# Altium PCB distribution amp.pcbdoc
Units mm, origin at the board's own origin, x right, y up, seen from the top; angles counter-clockwise.
Board outline 160.02 x 100 mm, 2 copper layers (Top Layer, Bottom Layer); 150 components, 152 nets, 512 pads, 80 vias.
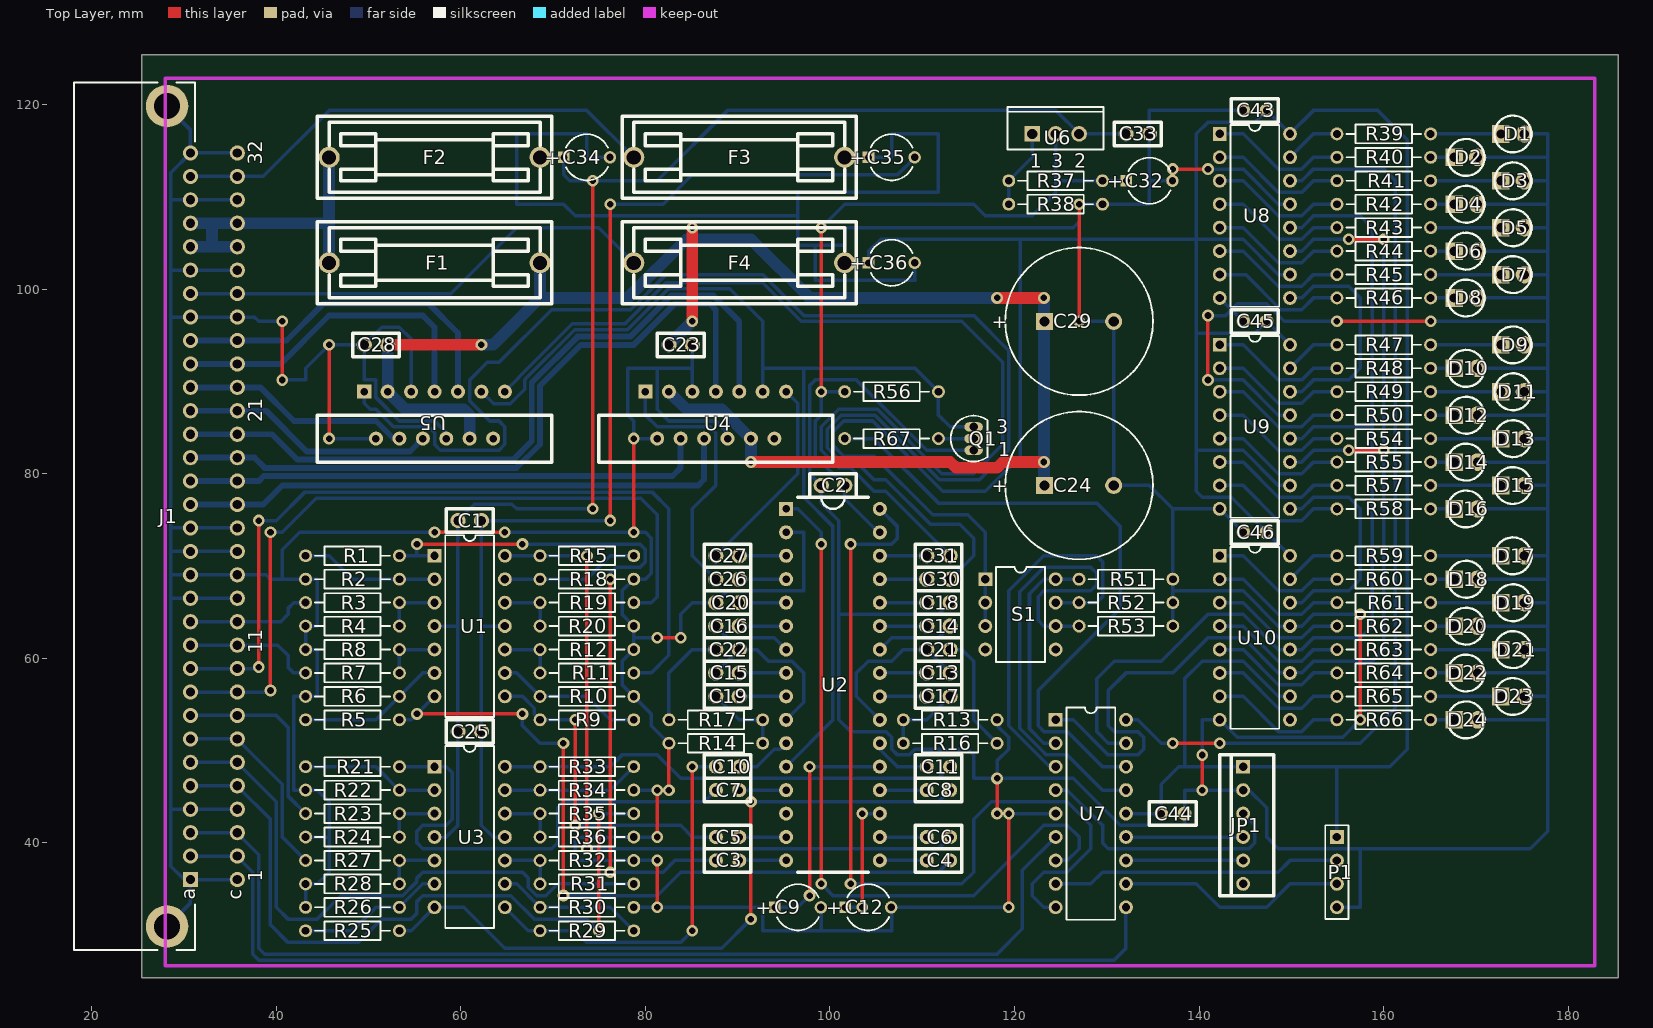
[diagram p0: Top Layer view]
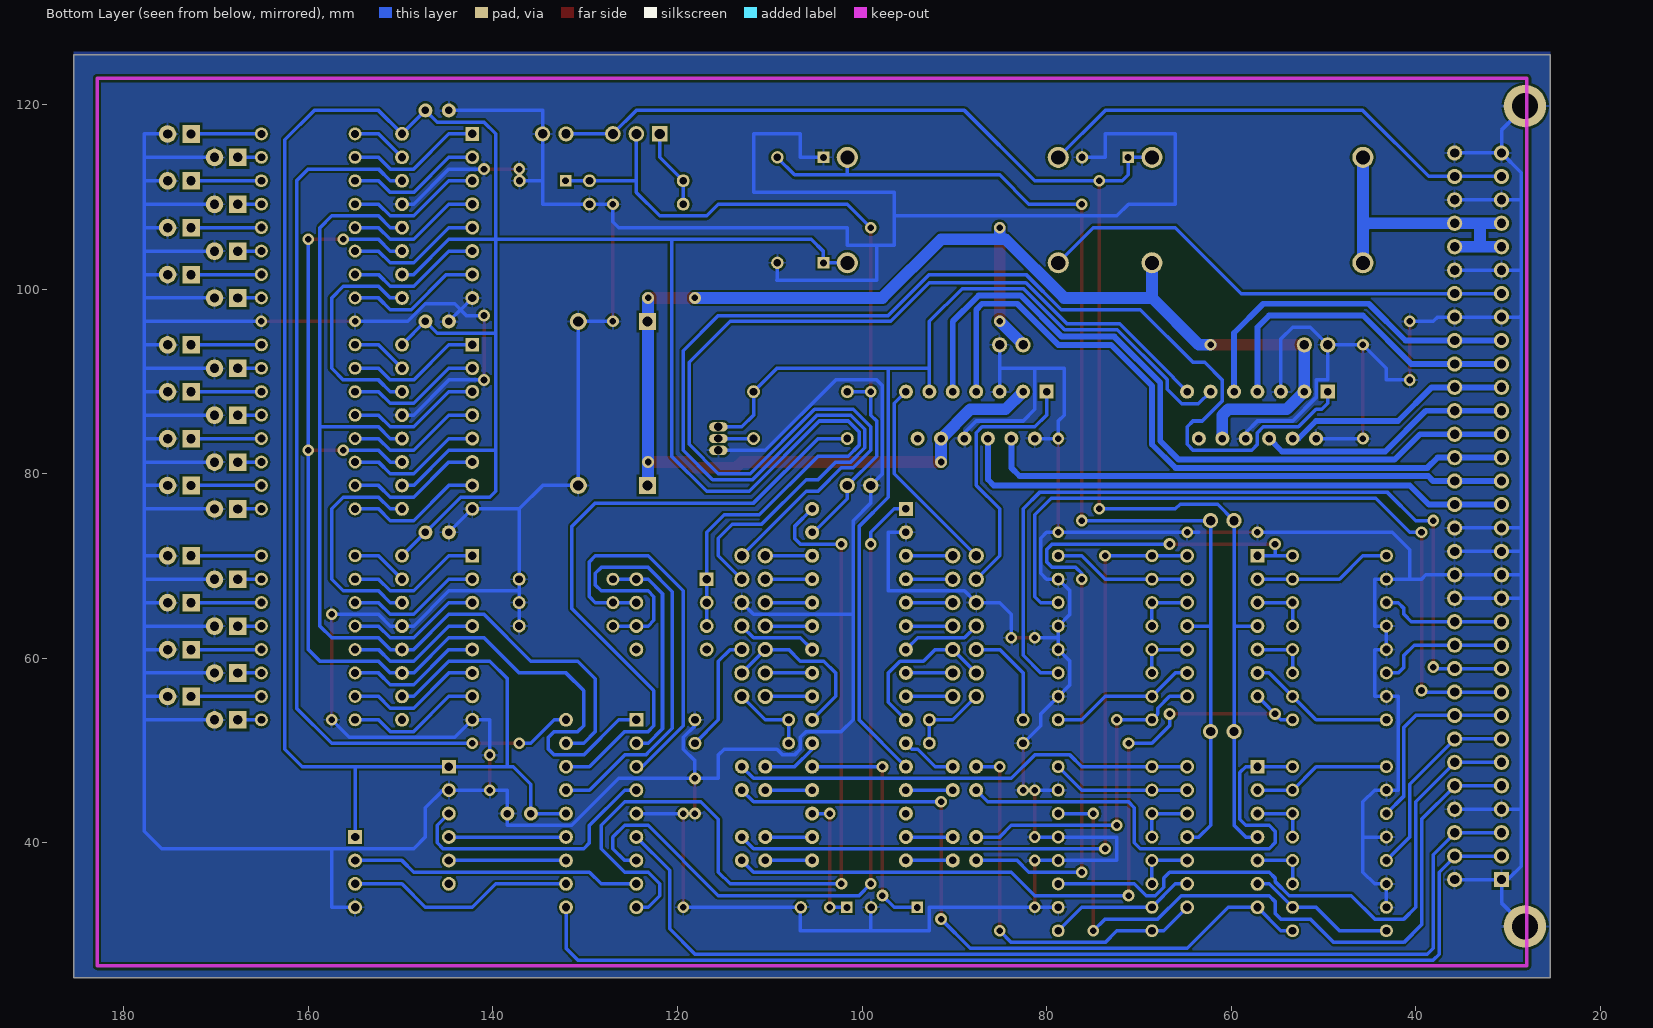
[diagram p1: Bottom Layer view, seen from below]

## Layer stack, top to bottom
Top Layer: signal copper 0.0356
Dielectric: dielectric 0.32, FR-4, Dk 4.8
Bottom Layer: signal copper 0.0356

## Board outline
25.4,25.4 185.42,25.4 185.42,125.4 25.4,125.4

## Design rules (kind name [scope] priority, off if disabled: settings)
Clearance [All] p1: gap=0.254
ComponentClearance [All] p1: gap=0.254 collisioncheckmode=3 verticalgap=0.254
PolygonConnect [All] p1: connectstyle=Relief reliefconductorwidth=0.254 reliefentries=4 polygonreliefangle="90 Angle"
RoomDefinition U_DIGITAL [InComponentClass('U_DIGITAL')] p1: confinementstyle=ConfineIn formatcopy=TRUE lockcomponents=FALSE outline 25.4,25.4 185.42,25.4 185.42,125.73 25.4,125.73
RoomDefinition "U_DC POWER" [InComponentClass('U_DC POWER')] p2: confinementstyle=ConfineIn formatcopy=TRUE lockcomponents=FALSE outline 185.42,25.4 25.4,25.4 25.4,125.73 185.42,125.73
RoomDefinition U_AUDIO [InComponentClass('U_AUDIO')] p3: confinementstyle=ConfineIn formatcopy=TRUE lockcomponents=FALSE outline 185.42,25.4 25.4,25.4 25.4,125.73 185.42,125.73
RoomDefinition "Distribution Amp" [InComponentClass('Distribution Amp')] p4: confinementstyle=ConfineIn formatcopy=TRUE lockcomponents=FALSE outline 25.4,25.4 185.42,25.4 185.42,125.73 25.4,125.73
RoutingVias [All] p1: holewidth=0.711 width=1.27 viastyle="Through Hole" minholewidth=0.711 minwidth=1.27 maxholewidth=0.711 maxwidth=1.27
SolderMaskExpansion [All] p1: expansion=0.102
TestPointUsage [All] p1: valid=0 allowmultiple=FALSE
Testpoint [All] p1: side=15 testpointundercomponent=TRUE minsize=1.016 maxsize=2.54 preferedsize=1.524 minholesize=0 maxholesize=1.016 preferedholesize=0.813 testpointgrid=0.025 style=1023 order=0-112345678
Width "Schematic Width Constraint_2" [InNet('LEFT_1+')] p1: maxlimit=6.35 minlimit=0.635 preferedwidth=0.635
Width "Schematic Width Constraint_9" [InNet('RIGHT_2-')] p2: maxlimit=6.35 minlimit=0.635 preferedwidth=0.635
Width "Schematic Width Constraint_8" [InNet('RIGHT_2+')] p3: maxlimit=6.35 minlimit=0.635 preferedwidth=0.635
Width "Schematic Width Constraint_7" [InNet('RIGHT_1-')] p4: maxlimit=6.35 minlimit=0.635 preferedwidth=0.635
Width "Schematic Width Constraint_6" [InNet('RIGHT_1+')] p5: maxlimit=6.35 minlimit=0.635 preferedwidth=0.635
Width "Schematic Width Constraint_5" [InNet('LEFT_2-')] p6: maxlimit=6.35 minlimit=0.635 preferedwidth=0.635
Width "Schematic Width Constraint_4" [InNet('LEFT_2+')] p7: maxlimit=6.35 minlimit=0.635 preferedwidth=0.635
Width "Schematic Width Constraint_3" [InNet('LEFT_1-')] p8: maxlimit=6.35 minlimit=0.635 preferedwidth=0.635
Width "Schematic Width Constraint" [InNet('+12VHP')] p9: maxlimit=6.35 minlimit=1.27 preferedwidth=1.27
Width "Schematic Width Constraint_1" [InNet('+12V IN')] p10: maxlimit=6.35 minlimit=1.27 preferedwidth=1.27
Width [All] p11: maxlimit=0.381 minlimit=0.254 preferedwidth=0.381
18 further rules are at their usual default settings.

## Classes and differential pairs
component class U_DIGITAL: C43 C44 C45 C46 D1 D2 D3 D4 D5 D6 D7 D8 D9 D10 D11 D12 D13 D14 D15 D16 D17 D18 D19 D20 D21 D22 D23 D24 JP1 P1 Q1 R39 R40 R41 R42 R43 R44 R45 R46 R47 R48 R49 R50 R51 R52 R53 R54 R55 R56 R57 R58 R59 R60 R61 R62 R63 R64 R65 R66 R67 S1 U7 U8 U9 U10
component class "U_DC POWER": C32 C33 C34 C35 C36 F1 F2 F3 F4 R37 R38 U6
component class U_AUDIO: C1 C2 C3 C4 C5 C6 C7 C8 C9 C10 C11 C12 C13 C14 C15 C16 C17 C18 C19 C20 C21 C22 C23 C24 C25 C26 C27 C28 C29 C30 C31 R1 R2 R3 R4 R5 R6 R7 R8 R9 R10 R11 R12 R13 R14 R15 R16 R17 R18 R19 R20 R21 R22 R23 R24 R25 R26 R27 R28 R29 R30 R31 R32 R33 R34 R35 R36 U1 U2 U3 U4 U5
component class "Distribution Amp": J1

## Components (designator, comment, footprint, x,y, rotation, side; value= is the part's Value field where it differs from the comment)
C1 "Cap" CAP_100#1 59.69,74.93 r0 top
C2 "Cap" CAP_100#1 101.6,78.74 r180 top
C3 "Cap" CAP_100#2 87.63,38.1 r0 top
C4 "Cap" CAP_100#2 113.03,38.1 r180 top
C5 "Cap" CAP_100#2 87.63,40.64 r0 top
C6 "Cap" CAP_100#2 113.03,40.64 r180 top
C7 "Cap" CAP_100#2 87.63,45.72 r0 top
C8 "Cap" CAP_100#2 113.03,45.72 r180 top
C9 "Cap Pol1" CAPPR5-5x5 96.52,33.02 r0 top
C10 "Cap" CAP_100#2 87.63,48.26 r0 top
C11 "Cap" CAP_100#2 113.03,48.26 r180 top
C12 "Cap Pol1" CAPPR5-5x5 104.14,33.02 r0 top
C13 "Cap" CAP_100#1 113.03,58.42 r180 top
C14 "Cap" CAP_100#1 113.03,63.5 r180 top
C15 "Cap" CAP_100#1 87.63,58.42 r0 top
C16 "Cap" CAP_100#1 87.63,63.5 r0 top
C17 "Cap" CAP_100#1 110.49,55.88 r0 top
C18 "Cap" CAP_100#1 110.49,66.04 r0 top
C19 "Cap" CAP_100#1 90.17,55.88 r180 top
C20 "Cap" CAP_100#1 90.17,66.04 r180 top
C21 "Cap" CAP_100#1 110.49,60.96 r0 top
C22 "Cap" CAP_100#1 90.17,60.96 r180 top
C23 "Cap" CAP_100#1 85.09,93.98 r180 top
C24 "Cap Pol1" CAPPR7.5-16x35 127,78.74 r0 top
C25 "Cap" CAP_100#1 59.69,52.07 r0 top
C26 "Cap" CAP_100#1 90.17,68.58 r180 top
C27 "Cap" CAP_100#1 90.17,71.12 r180 top
C28 "Cap" CAP_100#1 49.53,93.98 r0 top
C29 "Cap Pol1" CAPPR7.5-16x35 127,96.52 r0 top
C30 "Cap" CAP_100#1 110.49,68.58 r0 top
C31 "Cap" CAP_100#1 110.49,71.12 r0 top
C32 "Cap Pol1" CAPPR5-5x5 134.62,111.76 r0 top
C33 "Cap" CAP_100#1 134.62,116.84 r180 top
C34 "Cap Pol1" CAPPR5-5x5 73.66,114.3 r0 top
C35 "Cap Pol1" CAPPR5-5x5 106.68,114.3 r0 top
C36 "Cap Pol1" CAPPR5-5x5 106.68,102.87 r0 top
C43 "Cap" CAP_100#2 144.78,119.38 r0 top
C44 "Cap" CAP_100#2 138.43,43.18 r180 top
C45 "Cap" CAP_100#2 144.78,96.52 r0 top
C46 "Cap" CAP_100#2 144.78,73.66 r0 top
D1 "LED0" "LED 3MM" 172.72,116.84 r0 top
D2 "LED1" "LED 3MM" 167.64,114.3 r0 top
D3 "LED1" "LED 3MM" 172.72,111.76 r0 top
D4 "LED1" "LED 3MM" 167.64,109.22 r0 top
D5 "LED1" "LED 3MM" 172.72,106.68 r0 top
D6 "LED1" "LED 3MM" 167.64,104.14 r0 top
D7 "LED1" "LED 3MM" 172.72,101.6 r0 top
D8 "LED1" "LED 3MM" 167.64,99.06 r0 top
D9 "LED1" "LED 3MM" 172.72,93.98 r0 top
D10 "LED1" "LED 3MM" 167.64,91.44 r0 top
D11 "LED1" "LED 3MM" 172.72,88.9 r0 top
D12 "LED1" "LED 3MM" 167.64,86.36 r0 top
D13 "LED1" "LED 3MM" 172.72,83.82 r0 top
D14 "LED1" "LED 3MM" 167.64,81.28 r0 top
D15 "LED1" "LED 3MM" 172.72,78.74 r0 top
D16 "LED1" "LED 3MM" 167.64,76.2 r0 top
D17 "LED1" "LED 3MM" 172.72,71.12 r0 top
D18 "LED1" "LED 3MM" 167.64,68.58 r0 top
D19 "LED1" "LED 3MM" 172.72,66.04 r0 top
D20 "LED1" "LED 3MM" 167.64,63.5 r0 top
D21 "LED1" "LED 3MM" 172.72,60.96 r0 top
D22 "LED1" "LED 3MM" 167.64,58.42 r0 top
D23 "LED1" "LED 3MM" 172.72,55.88 r0 top
D24 "LED1" "LED 3MM" 167.64,53.34 r0 top
F1 "4A" "FUSE ALTRONICS S5985" 45.72,102.87 r0 top
F2 "1A" "FUSE ALTRONICS S5985" 45.72,114.3 r0 top
F3 "1A" "FUSE ALTRONICS S5985" 78.74,114.3 r0 top
F4 "1A" "FUSE ALTRONICS S5985" 78.74,102.87 r0 top
J1 "09 73 264 2801" 0973264X801 25.4,75.4 r90 top
JP1 "Header 6" "TERMINAL-6 POL" 144.78,48.26 r270 top
P1 "Header 4" HDR1X4 154.94,40.64 r270 top
Q1 "2N3904" TO-92A 115.57,83.82 r0 top
R1 "Res2" AXIAL-0.4 48.26,71.12 r0 top
R2 "Res2" AXIAL-0.4 48.26,68.58 r0 top
R3 "Res2" AXIAL-0.4 48.26,66.04 r0 top
R4 "Res2" AXIAL-0.4 48.26,63.5 r0 top
R5 "Res2" AXIAL-0.4 48.26,53.34 r0 top
R6 "Res2" AXIAL-0.4 48.26,55.88 r0 top
R7 "Res2" AXIAL-0.4 48.26,58.42 r0 top
R8 "Res2" AXIAL-0.4 48.26,60.96 r0 top
R9 "Res2" AXIAL-0.4 73.66,53.34 r180 top
R10 "Res2" AXIAL-0.4 73.66,55.88 r180 top
R11 "Res2" AXIAL-0.4 73.66,58.42 r180 top
R12 "Res2" AXIAL-0.4 73.66,60.96 r180 top
R13 "Res2" AXIAL-0.4 113.03,53.34 r0 top
R14 "Res2" AXIAL-0.4 87.63,50.8 r180 top
R15 "Res2" AXIAL-0.4 73.66,71.12 r180 top
R16 "Res2" AXIAL-0.4 113.03,50.8 r0 top
R17 "Res2" AXIAL-0.4 87.63,53.34 r180 top
R18 "Res2" AXIAL-0.4 73.66,68.58 r180 top
R19 "Res2" AXIAL-0.4 73.66,66.04 r180 top
R20 "Res2" AXIAL-0.4 73.66,63.5 r180 top
R21 "Res2" AXIAL-0.4 48.26,48.26 r0 top
R22 "Res2" AXIAL-0.4 48.26,45.72 r0 top
R23 "Res2" AXIAL-0.4 48.26,43.18 r0 top
R24 "Res2" AXIAL-0.4 48.26,40.64 r0 top
R25 "Res2" AXIAL-0.4 48.26,30.48 r0 top
R26 "Res2" AXIAL-0.4 48.26,33.02 r0 top
R27 "Res2" AXIAL-0.4 48.26,38.1 r0 top
R28 "Res2" AXIAL-0.4 48.26,35.56 r0 top
R29 "Res2" AXIAL-0.4 73.66,30.48 r180 top
R30 "Res2" AXIAL-0.4 73.66,33.02 r180 top
R31 "Res2" AXIAL-0.4 73.66,35.56 r180 top
R32 "Res2" AXIAL-0.4 73.66,38.1 r180 top
R33 "Res2" AXIAL-0.4 73.66,48.26 r180 top
R34 "Res2" AXIAL-0.4 73.66,45.72 r180 top
R35 "Res2" AXIAL-0.4 73.66,43.18 r180 top
R36 "Res2" AXIAL-0.4 73.66,40.64 r180 top
R37 "Res2" AXIAL-0.4 124.46,111.76 r0 top
R38 "Res2" AXIAL-0.4 124.46,109.22 r180 top
R39 "Res2" AXIAL-0.4 160.02,116.84 r0 top
R40 "Res2" AXIAL-0.4 160.02,114.3 r0 top
R41 "Res2" AXIAL-0.4 160.02,111.76 r0 top
R42 "Res2" AXIAL-0.4 160.02,109.22 r0 top
R43 "Res2" AXIAL-0.4 160.02,106.68 r0 top
R44 "Res2" AXIAL-0.4 160.02,104.14 r0 top
R45 "Res2" AXIAL-0.4 160.02,101.6 r0 top
R46 "Res2" AXIAL-0.4 160.02,99.06 r0 top
R47 "Res2" AXIAL-0.4 160.02,93.98 r0 top
R48 "Res2" AXIAL-0.4 160.02,91.44 r0 top
R49 "Res2" AXIAL-0.4 160.02,88.9 r0 top
R50 "Res2" AXIAL-0.4 160.02,86.36 r0 top
R51 "Res2" AXIAL-0.4 132.08,68.58 r180 top
R52 "Res2" AXIAL-0.4 132.08,66.04 r180 top
R53 "Res2" AXIAL-0.4 132.08,63.5 r180 top
R54 "Res2" AXIAL-0.4 160.02,83.82 r0 top
R55 "Res2" AXIAL-0.4 160.02,81.28 r0 top
R56 "Res2" AXIAL-0.4 106.68,88.9 r0 top
R57 "Res2" AXIAL-0.4 160.02,78.74 r0 top
R58 "Res2" AXIAL-0.4 160.02,76.2 r0 top
R59 "Res2" AXIAL-0.4 160.02,71.12 r0 top
R60 "Res2" AXIAL-0.4 160.02,68.58 r0 top
R61 "Res2" AXIAL-0.4 160.02,66.04 r0 top
R62 "Res2" AXIAL-0.4 160.02,63.5 r0 top
R63 "Res2" AXIAL-0.4 160.02,60.96 r0 top
R64 "Res2" AXIAL-0.4 160.02,58.42 r0 top
R65 "Res2" AXIAL-0.4 160.02,55.88 r0 top
R66 "Res2" AXIAL-0.4 160.02,53.34 r0 top
R67 "Res2" AXIAL-0.4 106.68,83.82 r180 top
S1 "SW-DIP4" DIP-8 120.65,64.77 r270 top
U1 "LM324AN" N014 60.96,63.5 r270 top
U2 "TEA6320" DIP32 95.25,76.2 r0 top
U3 "LM324AN" N014 60.96,40.64 r270 top
U4 "TDA1552" DBS13P 80.01,88.9 r0 top
U5 "TDA1552" DBS13P 49.53,88.9 r0 top
U6 "LM317T" TO220ABN 124.46,116.84 r0 top
U7 "PIC16F87-I/P" PDIP300-18 128.27,43.18 r270 top
U8 "SN74LS595N" N016 146.05,107.95 r270 top
U9 "SN74LS595N" N016 146.05,85.09 r270 top
U10 "SN74LS595N" N016 146.05,62.23 r270 top

## Footprints (in the part's own frame and the unit in brackets; to place one, negate y for a bottom-side part, rotate by r counter-clockwise, add the part's x,y. Pads: shape width x height; smd on the part's side, far side on the other; paste and mask are expansions set on the pad)
0973264X801 [mm] "Connector; DIN 41612, Type R, Thru-Hole; Rows a+c, 64 Position; Right Angle"
  round 4.6 hole 2.8: 33(-44.45,-2.76) 34(44.45,-2.76)
  rect 1.65x1.65 hole 1: A1(-39.37,-5.3)
  round 1.65 hole 1: A2(-36.83,-5.3) A3(-34.29,-5.3) A4(-31.75,-5.3) A5(-29.21,-5.3) A6(-26.67,-5.3) A7(-24.13,-5.3) A8(-21.59,-5.3) A9(-19.05,-5.3) A10(-16.51,-5.3) A11(-13.97,-5.3) A12(-11.43,-5.3) A13(-8.89,-5.3) A14(-6.35,-5.3) A15(-3.81,-5.3) A16(-1.27,-5.3) A17(1.27,-5.3) A18(3.81,-5.3) A19(6.35,-5.3) A20(8.89,-5.3) A21(11.43,-5.3) A22(13.97,-5.3) A23(16.51,-5.3) A24(19.05,-5.3) A25(21.59,-5.3) A26(24.13,-5.3) A27(26.67,-5.3) A28(29.21,-5.3) A29(31.75,-5.3) A30(34.29,-5.3) A31(36.83,-5.3) A32(39.37,-5.3) C1(-39.37,-10.38) C2(-36.83,-10.38) C3(-34.29,-10.38) C4(-31.75,-10.38) C5(-29.21,-10.38) C6(-26.67,-10.38) C7(-24.13,-10.38) C8(-21.59,-10.38) C9(-19.05,-10.38) C10(-16.51,-10.38) C11(-13.97,-10.38) C12(-11.43,-10.38) C13(-8.89,-10.38) C14(-6.35,-10.38) C15(-3.81,-10.38) C16(-1.27,-10.38) C17(1.27,-10.38) C18(3.81,-10.38) C19(6.35,-10.38) C20(8.89,-10.38) C21(11.43,-10.38) C22(13.97,-10.38) C23(16.51,-10.38) C24(19.05,-10.38) C25(21.59,-10.38) C26(24.13,-10.38) C27(26.67,-10.38) C28(29.21,-10.38) C29(31.75,-10.38) C30(34.29,-10.38) C31(36.83,-10.38) C32(39.37,-10.38)
  silkscreen extent -47,-5.8 47,7.34
AXIAL-0.4 [mm] "Resistor; 2 Leads"
  round 1.4 hole 0.85: 1(-5.08,0) 2(5.08,0)
  silkscreen extent -4.06,-1.02 4.06,1.02
CAP_100#1 [mil]
  round 65 hole 40: 1(0,0) 2(100,0)
  silkscreen extent -50,-50 150,50
CAP_100#2 [mil]
  round 60 hole 32: 1(0,0) 2(100,0)
  silkscreen extent -50,-50 150,50
CAPPR5-5x5 [mm] "Capacitor, Electrolytic, Radial; Body 5 x 5 mm (Dia.xH typ); Pin Spacing 5 mm (typ)"
  rect 1.25x1.25 hole 0.75: 1(-2.5,0)
  round 1.35 hole 0.8: 2(2.5,0)
  silkscreen extent -2.26,-2.5 2.27,2.5
CAPPR7.5-16x35 [mm] "Capacitor, Electrolytic, Radial; Body 16 x 35 mm (Dia.xH typ); Pin Spacing 7.5 mm (typ)"
  rect 1.85x1.85 hole 1.1: 1(-3.75,0)
  round 1.85 hole 1.1: 2(3.75,0)
  silkscreen extent -8,-8 8,8
DBS13P [mil] "DBS13P"
  rect 60x60 hole 32: 1(0,0)
  round 60 hole 32: 2(50,-200) 3(100,0) 4(150,-200) 5(200,0) 6(250,-200) 7(300,0) 8(350,-200) 9(400,0) 10(450,-200) 11(500,0) 12(550,-200) 13(600,0)
  silkscreen extent -200,-300 800,-100
DIP32 [mil] "DIP32"
  rect 60x60 hole 32: 1(0,0)
  round 60 hole 32: 2(0,-100) 3(0,-200) 4(0,-300) 5(0,-400) 6(0,-500) 7(0,-600) 8(0,-700) 9(0,-800) 10(0,-900) 11(0,-1000) 12(0,-1100) 13(0,-1200) 14(0,-1300) 15(0,-1400) 16(0,-1500) 17(400,-1500) 18(400,-1400) 19(400,-1300) 20(400,-1200) 21(400,-1100) 22(400,-1000) 23(400,-900) 24(400,-800) 25(400,-700) 26(400,-600) 27(400,-500) 28(400,-400) 29(400,-300) 30(400,-200) 31(400,-100) 32(400,0)
  silkscreen extent 50,-1550 350,50
DIP-8 [mm] "DIP; 8 Leads; Row Spacing 7.62 mm; Pitch 2.54 mm"
  rect 1.5x1.5 hole 0.9: 1(-3.81,-3.81)
  round 1.5 hole 0.9: 2(-1.27,-3.81) 3(1.27,-3.81) 4(3.81,-3.81) 5(3.81,3.81) 6(1.27,3.81) 7(-1.27,3.81) 8(-3.81,3.81)
  silkscreen extent -5.15,-2.65 5.15,2.65
"FUSE ALTRONICS S5985" [mil]
  round 90 hole 60: 1(0,0) 2(900,0)
  silkscreen extent -50,-175 950,175
HDR1X4 [mm] "Connector; Header; 4 Position"
  rect 1.5x1.5 hole 0.9: 1(0,0)
  round 1.5 hole 0.9: 2(2.54,0) 3(5.08,0) 4(7.62,0)
  silkscreen extent -1.27,-1.27 8.89,1.27
"LED 3MM" [mil]
  rect 75x75 hole 40: 1(0,-0.37)
  round 75 hole 40: 2(100,-0.37)
  silkscreen extent -28,-79 130,78
N014 [mm] "DIP; 14 Leads; Row Spacing 7.62 mm; Pitch 2.54 mm"
  rect 1.5x1.5 hole 0.9: 1(-7.62,-3.81)
  round 1.5 hole 0.9: 2(-5.08,-3.81) 3(-2.54,-3.81) 4(0,-3.81) 5(2.54,-3.81) 6(5.08,-3.81) 7(7.62,-3.81) 8(7.62,3.81) 9(5.08,3.81) 10(2.54,3.81) 11(0,3.81) 12(-2.54,3.81) 13(-5.08,3.81) 14(-7.62,3.81)
  silkscreen extent -9.85,-2.65 9.85,2.65
N016 [mm] "DIP; 16 Leads; Row Spacing 7.62 mm; Pitch 2.54 mm"
  rect 1.5x1.5 hole 0.9: 1(-8.89,-3.81)
  round 1.5 hole 0.9: 2(-6.35,-3.81) 3(-3.81,-3.81) 4(-1.27,-3.81) 5(1.27,-3.81) 6(3.81,-3.81) 7(6.35,-3.81) 8(8.89,-3.81) 9(8.89,3.81) 10(6.35,3.81) 11(3.81,3.81) 12(1.27,3.81) 13(-1.27,3.81) 14(-3.81,3.81) 15(-6.35,3.81) 16(-8.89,3.81)
  silkscreen extent -9.85,-2.65 9.85,2.65
PDIP300-18 [mm] "DIP, Plastic; 18 Leads; Row Spacing 7.62 mm; Pitch 2.54 mm"
  rect 1.5x1.5 hole 0.9: 1(-10.16,-3.81)
  round 1.5 hole 0.9: 2(-7.62,-3.81) 3(-5.08,-3.81) 4(-2.54,-3.81) 5(0,-3.81) 6(2.54,-3.81) 7(5.08,-3.81) 8(7.62,-3.81) 9(10.16,-3.81) 10(10.16,3.81) 11(7.62,3.81) 12(5.08,3.81) 13(2.54,3.81) 14(0,3.81) 15(-2.54,3.81) 16(-5.08,3.81) 17(-7.62,3.81) 18(-10.16,3.81)
  silkscreen extent -11.5,-2.65 11.5,2.65
"TERMINAL-6 POL" [mm]
  rect 1.5x1.5 hole 0.9: 1(0,0)
  round 1.5 hole 0.9: 2(2.54,0) 3(5.08,0) 4(7.62,0) 5(10.16,0) 6(12.7,0)
  silkscreen extent -1.27,-2.54 13.97,3.3
TO220ABN [mm] "TO, Thru-Hole, Vertical, Heatsink Mounted; 3 In-Line Leads; Pitch 2.54 mm; Pin sequence 1, 3, 2"
  rect 1.7x1.7 hole 1.1: 1(-2.54,0)
  round 1.7 hole 1.1: 2(2.54,0) 3(0,0)
  silkscreen extent -5.2,-1.7 5.2,2.9
TO-92A [mm] "TO, Flat Index; 3 In-Line, Axial Leads; Body Dia. 4.5mm; Leads 0.51 x 0.48 mm (max)"
  oval 2x1 hole 0.9: 1(0,-1.27) 2(0,0) 3(0,1.27)
  silkscreen extent -2.48,-2.48 1.5,2.48

## Part data
C1 C2 C3 C4 C5 C6 C7 C8 C10 C11 C13 C14 C15 C16 C17 C18 C19 C20 C21 C22 C23 C25 C26 C27 C28 C30 C31 C33 C43 C44 C45 C46: "Capacitor"
C9 C12 C24 C29 C32 C34 C35 C36: "Polarized Capacitor (Radial)"
D1: "Typical INFRARED GaAs LED"
D2 D3 D4 D5 D6 D7 D8 D9 D10 D11 D12 D13 D14 D15 D16 D17 D18 D19 D20 D21 D22 D23 D24: library part LED0, "Typical INFRARED GaAs LED"
F1 F2 F3 F4: library part "FUSE ALTRONICS S5985"
J1: "Eurocard DIN 41612, Type R, 64 Position, Rows a+c, Performance level 1, Female, Lead 3.0 mm, Pitch 2.54 mm"
JP1: "Header, 6-Pin"
P1: "Header, 4-Pin"
Q1: "NPN General Purpose Amplifier"
R1 R2 R3 R4 R5 R6 R7 R8 R9 R10 R11 R12 R13 R14 R15 R16 R17 R18 R19 R20 R21 R22 R23 R24 R25 R26 R27 R28 R29 R30 R31 R32 R33 R34 R35 R36 R37 R38 R39 R40 R41 R42 R43 R44 R45 R46 R47 R48 R49 R50 R51 R52 R53 R54 R55 R56 R57 R58 R59 R60 R61 R62 R63 R64 R65 R66 R67: "Resistor"
S1: "DIP Switch"
U1 U3: "Quadruple Operational Amplifier"
U2: "TEA6320 SOUND FADER CONTROL"
U6: "1.2V to 37V Voltage Regulator"
U7: "Enhanced FLASH Microcontroller with nanoWatt Technology, 4K (x14-Bit words) FLASH, 368 Bytes RAM, 18-Pin PDIP, Standard VDD Range, Industrial Temperature"
U8 U9 U10: "8-Bit Shift Register with Output Latch"

## Via types
v1: diameter 1.27, hole 0.711, Top Layer to Bottom Layer, 80 vias

## Nets (pads, with @x,y where several pads share a name; then routed paths per layer and width w, separated by ;. In a path a pad name is that pad's centre, name@x,y a point inside that pad or via, vN(x,y) a via of type N, cw(c..) or ccw(c..) an arc to the next point about the centre after c; other vN are vias at no path point)
5V: C36.1 C43.2 C44.2 C45.2 C46.2 F4.2 JP1.1 P1.1 S1.1 S1.2 S1.3 U7.14 U8.10 U8.16 U9.10 U9.16 U10.10 U10.16 | length 367.5
  Bottom Layer w0.381: F4.2 C36.1 104.18,104.1 105.49,105.41 144.78,105.41 148.59,101.6 U8.10 ; S1.3 116.84,73.66 114.935,75.565 111.125,75.565 104.775,81.915 101.491,81.915 100.33,83.076 100.33,84.564 101.491,85.725 104.621,85.725 112.241,78.105 116.84,78.105 120.65,81.915 120.65,105.41 ; U7.14 C44.2 135.89,46.355 137.795,48.26 160.655,48.26 162.56,50.165 162.56,116.205 159.385,119.38 152.4,119.38 U8.16 C43.2 146.05,118.11 140.97,118.11 139.7,116.84 139.7,78.105 140.335,77.47 143.51,77.47 U10.16 ; 138.43,48.26 138.43,57.785 140.335,59.69 144.78,59.69 148.59,55.88 U10.10 ; 139.7,82.55 144.78,82.55 148.59,78.74 U9.10 ; 139.7,95.25 146.05,95.25 C45.2 U9.16 ; P1.1 154.94,48.26
8V5: C2.1 C32.1 R37.2 R56.1 U2.31 U6.3 | length 80.8
  Top Layer w0.381: v1(99.06,88.9) v1(99.06,106.68)
  Bottom Layer w0.381: v1(99.06,106.68) 101.6,109.22 115.57,109.22 116.84,107.95 121.92,107.95 124.46,110.49 U6.3 ; R56.1 v1(99.06,88.9) 99.06,86.36 98.425,85.725 98.425,81.915 C2.1 101.6,77.307 105.247,73.66 U2.31 ; 124.46,111.76 C32.1@132.08,111.76
"+5V IN": F4.1 J1.A26 J1.C26 | length 52.6
  Bottom Layer w0.381: J1.A26 58.89,99.53 66.04,106.68 74.93,106.68 F4.1
+12V: C1.1 C25.1 C33.2 C34.1 F2.2 U1.4 U3.4 U6.2 | length 159.6
  Top Layer w0.381: v1(74.295,76.2) v1(74.295,111.76)
  Bottom Layer w0.381: U3.4 58.42,40.64 59.69,41.91 C1.1 61.468,76.708 65.532,76.708 66.04,76.2 v1(74.295,76.2) ; U1.4 59.69,63.5 ; F2.2 C34.1 71.16,112.395 71.795,111.76 81.28,111.76 88.9,119.38 124.46,119.38 U6.2 C33.2
"+12V IN": F1.1 F2.1 J1.A28 J1.A29 J1.C28 J1.C29 | length 34.3
  Bottom Layer w1.27: J1.A28 J1.C28 ; J1.A29 45.25,107.15 45.72,106.68 ; 33.02,104.61 33.02,107.15 ; F1.1 F2.1
+12VHP: C23.2 C24.1 C28.2 C29.1 F1.2 U4.3 U4.10 U5.3 U5.10 | length 181
  Top Layer w1.27: C28.2 v1(62.23,93.98) ; v1(85.09,96.52) v1(85.09,106.68) ; v1(91.44,81.28) 113.03,81.28 113.665,80.645 118.11,80.645 118.745,81.28 v1(123.19,81.28) ; v1(118.11,99.06) v1(123.19,99.06)
  Bottom Layer w1.27: C28.2 U5.3 53.975,86.995 60.325,86.995 60.96,86.36 U5.10 ; v1(62.23,93.98) 63.5,93.98 68.58,99.06 ; F1.2 68.58,99.06 ; U4.3 84.455,86.995 88.265,86.995 U4.10 v1(91.44,81.28) ; C23.2 v1(85.09,96.52) ; 85.09,105.41 v1(85.09,106.68) ; v1(118.11,99.06) 97.79,99.06 91.44,105.41 84.455,105.41 78.105,99.06 68.58,99.06 ; C24.1@123.19,78.8 v1(123.19,99.06) ; C29.1@123.19,96.52 C29.1
-12V: C1.2 C25.2 C35.2 F3.2 U1.11 U3.11 | length 123.9
  Top Layer w0.381: v1(76.2,74.93) v1(76.2,109.22)
  Bottom Layer w0.381: 62.23,63.5 U1.11 ; U3.11 63.5,40.64 62.23,41.91 C1.2 v1(76.2,74.93) ; v1(76.2,109.22) 81.915,109.22 85.09,112.395 107.315,112.395 109.18,114.26 C35.2 ; 101.6,112.395 F3.2
"-12V IN": F3.1 J1.A31 J1.C31 | length 53.1
  Bottom Layer w0.381: J1.A31 38.57,112.23 45.72,119.38 73.66,119.38 F3.1
BAS_0: R47.1 U9.15 | length 6.1
  Bottom Layer w0.381: U9.15 152.4,93.98 R47.1
BAS_1: R48.1 U9.1 | length 14.8
  Bottom Layer w0.381: U9.1 144.78,93.98 148.59,90.17 151.13,90.17 152.4,91.44 R48.1
BAS_2: R49.1 U9.2 | length 14.8
  Bottom Layer w0.381: U9.2 144.78,91.44 148.59,87.63 151.13,87.63 152.4,88.9 R49.1
BAS_3: R50.1 U9.3 | length 14.8
  Bottom Layer w0.381: U9.3 144.78,88.9 148.59,85.09 151.13,85.09 152.4,86.36 R50.1
BAS_4: R54.1 U9.4 | length 14.8
  Bottom Layer w0.381: U9.4 144.78,86.36 148.59,82.55 151.13,82.55 152.4,83.82 R54.1
BAS_5: R55.1 U9.5 | length 14.8
  Bottom Layer w0.381: U9.5 144.78,83.82 148.59,80.01 151.13,80.01 152.4,81.28 R55.1
BAS_6: R57.1 U9.6 | length 14.8
  Bottom Layer w0.381: U9.6 144.78,81.28 148.59,77.47 151.13,77.47 152.4,78.74 R57.1
BAS_7: R58.1 U9.7 | length 14.8
  Bottom Layer w0.381: U9.7 144.78,78.74 148.59,74.93 151.13,74.93 152.4,76.2 R58.1
GND: C2.2 C9.2 C12.2 C18.2 C20.2 C23.1 C24.2 C28.1 C29.2 C32.2 C33.1 C34.2 C35.1 C36.2 C43.1 C44.1 C45.1 C46.1 D1.2 D2.2 D3.2 D4.2 D5.2 D6.2 D7.2 D8.2 D9.2 D10.2 D11.2 D12.2 D13.2 D14.2 D15.2 D16.2 D17.2 D18.2 D19.2 D20.2 D21.2 D22.2 D23.2 D24.2 J1.33 J1.34 J1.A1 J1.A4 J1.A13 J1.A14 J1.A15 J1.A16 J1.A25 J1.A27 J1.A30 J1.A32 J1.C1 J1.C4 J1.C13 J1.C14 J1.C15 J1.C16 J1.C25 J1.C27 J1.C30 J1.C32 JP1.2 P1.4 Q1.1 R2.1 R4.1 R6.1 R8.1 R10.1 R12.1 R13.2 R14.2 R18.1 R20.1 R22.1 R24.1 R26.1 R28.1 R30.1 R32.1 R34.1 R36.1 R38.1 R51.1 R52.1 R53.1 U2.2 U4.2 U4.5 U4.8 U5.2 U5.5 U5.8 U7.5 U8.8 U8.13 U9.8 U9.13 U10.8 U10.13 | length 1289.7
  Top Layer w0.381: v1(40.64,90.17) v1(40.64,96.52) ; v1(45.72,83.82) v1(45.72,93.98) ; v1(57.15,73.66) v1(64.77,73.66) ; v1(78.74,73.66) v1(78.74,83.82) ; v1(81.28,33.02) v1(81.28,38.1) ; v1(81.28,40.64) v1(81.28,45.72) ; v1(81.28,62.23) v1(83.82,62.23) ; v1(82.55,45.72) R14.2 ; v1(118.11,43.18) v1(118.11,46.99) ; v1(119.38,33.02) v1(119.38,43.18) ; v1(127,96.52) v1(127,109.22) ; v1(137.16,113.03) v1(140.97,113.03) ; v1(140.335,45.72) v1(140.335,49.53) ; v1(140.97,90.17) v1(140.97,97.155) ; v1(154.94,96.52) v1(165.1,96.52) ; v1(157.48,53.34) v1(157.48,64.77)
  Bottom Layer w0.381: J1.33 30.7,33.49 J1.A1 ; J1.34 28.16,119.795 30.7,117.255 J1.A32 ; 28.575,43.815 28.74,43.65 J1.C4 ; 28.575,66.675 28.74,66.51 J1.C13 ; 28.575,69.215 28.74,69.05 38.9,69.05 39.37,68.58 44.45,68.58 44.45,63.5 R4.1 R8.1 44.45,60.96 44.45,55.88 41.91,55.88 41.91,45.72 44.45,45.72 45.72,44.45 45.72,36.83 44.45,35.56 R28.1 R26.1 ; 28.575,71.755 28.74,71.59 J1.C15 ; 28.575,74.295 28.74,74.13 J1.C16 ; 28.575,97.155 28.74,96.99 37.63,96.99 38.1,96.52 v1(40.64,96.52) ; 28.575,102.235 28.74,102.07 J1.C27 ; 28.575,109.855 28.74,109.69 J1.C30 ; J1.C1 J1.A1 ; J1.C32 J1.A32 ; 40.64,68.58 40.64,71.755 42.545,73.66 v1(57.15,73.66) ; v1(40.64,90.17) 43.18,90.17 43.18,91.44 v1(45.72,93.98) C28.1 ; R24.1 45.72,40.64 ; v1(45.72,83.82) U5.2 ; U5.5 54.61,94.615 53.34,95.885 51.435,95.885 C28.1 ; U5.8 58.42,84.455 57.15,85.725 53.34,85.725 50.8,88.265 50.8,90.17 49.53,90.17 C28.1 ; 63.5,73.66 80.01,73.66 80.645,73.025 80.645,69.215 80.01,68.58 R18.1 77.47,67.31 77.47,64.77 R20.1 R12.1 77.47,59.69 77.47,57.15 80.645,53.975 80.645,52.705 R14.2 ; C34.2 73.66,114.3 73.66,116.84 66.04,116.84 66.04,109.22 71.12,109.22 72.39,107.95 96.52,107.95 ; R30.1 92.71,33.02 92.71,30.48 106.68,30.48 106.68,32.98 C12.2 v1(119.38,33.02) ; R34.1 v1(82.55,45.72) ; 78.74,62.23 v1(81.28,62.23) ; v1(81.28,38.1) 72.39,38.1 72.39,40.64 v1(81.28,40.64) ; U4.2 v1(78.74,83.82) 78.74,85.725 78.105,86.36 78.105,91.44 85.09,91.44 ; 81.28,91.44 81.28,86.995 82.55,85.725 87.63,85.725 88.9,84.455 U4.8 ; v1(83.82,62.23) 83.82,64.77 85.09,66.04 C20.2 88.9,67.31 97.155,67.31 97.155,73.66 U2.2 ; U4.5 C23.1 ; 98.425,104.775 98.425,100.965 109.22,100.965 109.18,101.005 C36.2 ; C9.2 99.06,32.98 99.06,30.48 ; 100.965,64.77 111.76,64.77 C18.2 ; C35.1 106.68,114.3 106.68,116.84 111.76,116.84 111.76,110.49 96.52,110.49 96.52,104.775 101.6,104.775 101.6,106.68 126.365,106.68 127,107.315 v1(127,109.22) 134.62,109.22 134.62,119.38 C43.1 ; Q1.1 110.49,82.55 102.87,90.17 98.425,90.17 97.79,89.535 97.79,80.01 C2.2 99.06,76.835 100.965,74.93 100.965,53.34 102.235,52.07 106.045,52.07 106.68,51.435 106.68,50.165 107.315,49.53 108.585,49.53 109.22,50.165 114.935,50.165 115.57,49.53 115.57,46.99 126.365,46.99 131.445,41.91 138.43,41.91 138.43,45.72 145.415,45.72 147.32,43.815 147.32,40.64 148.59,39.37 175.895,39.37 177.8,41.275 177.8,116.84 D1.2@175.26,116.84 ; v1(118.11,43.18) U7.5 ; v1(118.11,46.99) 118.11,48.895 119.38,50.165 119.38,51.435 118.11,52.705 R13.2 ; v1(127,96.52) C29.2@130.81,96.52 ; C29.2 C24.2 134.62,78.74 137.16,76.2 ; 134.62,111.76 C32.2@137.16,111.76 ; C32.2 137.16,111.8 v1(137.16,113.03) ; R53.1 137.16,76.2 ; 137.16,67.31 144.78,67.31 148.59,63.5 151.13,63.5 152.4,64.77 v1(157.48,64.77) ; v1(140.335,49.53) 140.335,53.34 U10.8 144.145,51.435 155.575,51.435 v1(157.48,53.34) ; v1(140.97,90.17) 144.78,90.17 148.59,86.36 U9.13 ; v1(140.97,97.155) 142.896,97.155 143.52,97.78 C45.1 ; v1(140.97,113.03) 144.78,113.03 148.59,109.22 U8.13 ; U8.8 143.51,97.79 144.145,98.425 147.32,98.425 149.225,96.52 v1(154.94,96.52) ; C46.1 U9.8 137.16,76.2 ; P1.4 157.48,33.02 157.48,39.37 ; v1(165.1,96.52) 177.8,96.52 ; D24.2@170.18,53.34 177.8,53.34 ; D22.2@170.18,58.42 177.8,58.42 ; D20.2@170.18,63.5 177.8,63.5 ; D18.2@170.18,68.58 177.8,68.58 ; D16.2@170.18,76.2 177.8,76.2 ; D14.2@170.18,81.28 177.8,81.28 ; D12.2@170.18,86.36 177.8,86.36 ; D10.2@170.18,91.44 177.8,91.44 ; D8.2@170.18,99.06 177.8,99.06 ; D6.2@170.18,104.14 177.8,104.14 ; D4.2@170.18,109.22 177.8,109.22 ; D2.2@170.18,114.3 177.8,114.3 ; D23.2@175.26,55.88 177.8,55.88 ; D21.2@175.26,60.96 177.8,60.96 ; D19.2@175.26,66.04 177.8,66.04 ; D17.2@175.26,71.12 177.8,71.12 ; D15.2@175.26,78.74 177.8,78.74 ; D13.2@175.26,83.82 177.8,83.82 ; D11.2@175.26,88.9 177.8,88.9 ; D9.2@175.26,93.98 177.8,93.98 ; D7.2@175.26,101.6 177.8,101.6 ; D5.2@175.26,106.68 177.8,106.68 ; D3.2@175.26,111.76 177.8,111.76 ; J1.A1 30.535,36.195 29.845,36.195 28.575,37.465 28.575,112.645 J1.A32
ID_0: R51.2 S1.8 U7.2 | length 24.2
  Bottom Layer w0.381: U7.2 123.19,50.8 121.627,52.363 121.627,67.017 123.19,68.58 R51.2
ID_1: R52.2 S1.7 U7.3 | length 42.7
  Bottom Layer w0.381: U7.3 123.825,48.26 119.38,52.705 119.38,67.31 123.19,71.12 128.905,71.12 129.54,70.485 129.54,66.675 128.905,66.04 S1.7
ID_2: R53.2 S1.6 U7.15 | length 54.2
  Bottom Layer w0.381: R53.2 123.19,63.5 122.555,64.135 122.555,66.675 123.19,67.31 128.27,67.31 128.905,67.945 128.905,69.215 128.27,69.85 123.19,69.85 120.553,67.213 120.553,52.43 121.099,51.884 123.004,49.979 123.453,49.53 125.73,49.53 129.54,45.72 U7.15
IN_AL: C3.1 R1.2 U1.1 | length 80.1
  Top Layer w0.381: v1(55.245,72.39) v1(66.675,72.39) ; v1(76.2,36.83) v1(76.2,68.58)
  Bottom Layer w0.381: R1.2 U1.1 ; 55.245,71.12 v1(55.245,72.39) ; v1(66.675,72.39) 79.375,72.39 80.01,71.755 80.01,70.485 79.375,69.85 76.835,69.85 76.2,69.215 v1(76.2,68.58) ; v1(76.2,36.83) 81.915,36.83 83.185,38.1 C3.1
IN_AR: C4.1 R5.2 U1.7 | length 82.8
  Top Layer w0.381: v1(55.245,53.975) v1(66.675,53.975) ; v1(71.12,34.29) v1(71.12,50.8)
  Bottom Layer w0.381: R5.2 54.61,53.34 U1.7 ; v1(66.675,53.975) 66.675,52.705 68.58,50.8 v1(71.12,50.8) ; v1(71.12,34.29) 81.28,34.29 83.82,36.83 111.76,36.83 C4.1
IN_BL: C5.1 R9.2 U1.8 | length 36.2
  Top Layer w0.381: v1(72.39,41.91) v1(72.39,53.34)
  Bottom Layer w0.381: U1.8 66.675,55.88 67.945,54.61 67.945,53.975 R9.2 v1(72.39,53.34) ; v1(72.39,41.91) 83.82,41.91 85.09,40.64 C5.1
IN_BR: C6.1 R15.2 U1.14 | length 80.5
  Top Layer w0.381: v1(73.66,39.37) v1(73.66,71.12)
  Bottom Layer w0.381: U1.14 v1(73.66,71.12) ; v1(73.66,39.37) 111.76,39.37 C6.1
IN_CL: C7.1 R21.2 U3.1 | length 54.2
  Bottom Layer w0.381: R21.2 58.42,48.26 59.055,47.625 59.055,42.545 58.42,41.91 55.88,41.91 55.245,41.275 55.245,40.005 55.88,39.37 69.85,39.37 70.485,40.005 70.485,43.815 71.12,44.45 86.36,44.45 C7.1
IN_CR: C8.1 R25.2 U3.7 | length 77.1
  Top Layer w0.381: v1(91.44,31.75) v1(91.44,44.45)
  Bottom Layer w0.381: R25.2 54.61,30.48 U3.7 60.325,33.02 64.77,28.575 88.265,28.575 v1(91.44,31.75) ; v1(91.44,44.45) 111.76,44.45 C8.1
IN_DL: C10.1 R29.2 U3.8 | length 42.7
  Top Layer w0.381: v1(85.09,30.48) v1(85.09,48.26)
  Bottom Layer w0.381: U3.8 67.31,30.48 72.39,30.48 73.66,29.21 83.82,29.21 v1(85.09,30.48) ; v1(85.09,48.26) C10.1
IN_DR: C11.1 R33.2 U3.14 | length 50.4
  Bottom Layer w0.381: U3.14 76.2,48.26 77.47,49.53 81.28,49.53 83.82,46.99 111.76,46.99 C11.1
INL_1: J1.A12 J1.C12 R3.1 | length 13.7
  Bottom Layer w0.381: J1.A12 40.475,63.97 41.275,64.77 41.275,65.405 41.91,66.04 R3.1
INL_2: J1.A10 J1.C10 R11.1 | length 90.2
  Top Layer w0.381: v1(38.1,59.055) v1(38.1,74.93)
  Bottom Layer w0.381: J1.A10 35.09,58.89 J1.C10@35.56,58.42 ; J1.C10 37.935,58.89 v1(38.1,59.055) ; v1(38.1,74.93) 40.005,74.93 43.053,77.978 80.772,77.978 82.55,76.2 82.55,60.325 80.645,58.42 R11.1
INL_3: J1.A8 J1.C8 R23.1 | length 21.3
  Bottom Layer w0.381: J1.A8 40.005,53.81 41.275,52.54 41.275,45.085 R23.1
INL_4: J1.A6 J1.C6 R31.1 | length 66.3
  Bottom Layer w0.381: J1.A6 J1.C6 35.78,48.675 40.005,44.45 40.005,33.02 41.275,31.75 44.45,31.75 46.99,34.29 53.712,34.29 55.245,35.823 55.245,36.195 55.88,36.83 66.675,36.83 67.31,36.195 67.31,35.188 68.208,34.29 69.215,34.29 70.485,35.56 R31.1
INR_1: J1.A11 J1.C11 R7.1 | length 14.4
  Bottom Layer w0.381: J1.A11 35.09,61.43 J1.C11@35.56,60.96 ; J1.C11 40.17,61.43 41.275,60.325 41.275,59.055 41.91,58.42 R7.1
INR_2: J1.A9 J1.C9 R19.1 | length 81.7
  Top Layer w0.381: v1(39.37,56.515) v1(39.37,73.66)
  Bottom Layer w0.381: J1.A9 39.205,56.35 v1(39.37,56.515) ; v1(39.37,73.66) 40.64,73.66 44.323,77.343 79.502,77.343 81.28,75.565 81.28,66.675 80.645,66.04 R19.1
INR_3: J1.A7 J1.C7 R27.1 | length 21.3
  Bottom Layer w0.381: J1.A7 J1.C7 35.78,51.215 40.64,46.355 40.64,40.64 R27.1
INR_4: J1.A5 J1.C5 R35.1 | length 78.9
  Top Layer w0.381: v1(74.93,30.48) v1(74.93,43.18)
  Bottom Layer w0.381: J1.A5 J1.C5 35.78,46.135 39.37,42.545 39.37,31.115 41.275,29.21 48.895,29.21 51.435,31.75 54.61,31.75 55.245,32.385 55.245,33.655 55.88,34.29 65.405,34.29 67.945,31.75 73.66,31.75 v1(74.93,30.48) ; v1(74.93,43.18) R35.1
L1_IN: C26.2 U4.1 | length 28.9
  Bottom Layer w0.381: U4.1 80.01,86.36 81.28,85.09 86.995,85.09 87.63,84.455 87.63,78.74 85.09,76.2 85.09,71.12 C26.2
L2_IN: C30.2 U5.1 | length 158.1
  Bottom Layer w0.381: U5.1 49.53,87.63 50.165,86.995 50.8,86.995 52.705,85.09 56.515,85.09 57.15,84.455 57.15,83.185 57.785,82.55 64.135,82.55 64.77,83.185 64.77,85.09 64.135,85.725 63.122,85.725 60.96,87.887 60.96,90.17 62.865,92.075 64.135,92.075 69.85,97.79 78.419,97.79 82.229,101.6 92.71,101.6 97.155,97.155 115.57,97.155 119.38,93.345 119.38,82.55 116.205,79.375 111.869,79.375 104.884,86.36 101.228,86.36 99.695,84.827 99.695,82.813 101.228,81.28 102.87,81.28 104.775,79.375 106.045,79.375 110.892,74.528 114.067,74.528 115.57,73.025 115.57,71.12 C30.2
LEFT_1+: J1.A18 J1.C18 U4.4 | length 56.9
  Bottom Layer w0.635: J1.A18 38.1,79.21 38.646,79.756 82.931,79.756 83.82,80.645 U4.4
LEFT_1-: J1.A17 J1.C17 U4.6 | length 61.2
  Bottom Layer w0.635: J1.A17 38.57,76.67 40.64,78.74 85.725,78.74 86.36,79.375 U4.6
LEFT_2+: J1.A22 J1.C22 U5.4 | length 24.9
  Bottom Layer w0.635: J1.A22 38.265,89.37 41.91,85.725 50.8,85.725 52.705,83.82 U5.4
LEFT_2-: J1.A21 J1.C21 U5.6 | length 27.6
  Bottom Layer w0.635: J1.A21 38.9,86.83 43.307,82.423 54.483,82.423 U5.6
MCLR: JP1.3 U7.4 | length 29.3
  Bottom Layer w0.381: U7.4 125.73,45.72 129.54,41.91 129.54,40.005 130.175,39.37 145.415,39.37 146.05,40.005 146.05,41.91 JP1.3
MUTE: Q1.3 R56.2 U2.12 U4.11 U5.11 | length 119.5
  Bottom Layer w0.381: U5.11 63.553,87.577 65.352,87.577 66.929,89.154 66.929,90.219 72.341,95.631 78.056,95.631 82.501,100.076 89.154,100.076 92.71,96.52 U4.11 ; 92.71,91.44 109.22,91.44 R56.2 111.76,86.36 113.03,85.09 Q1.3 ; U2.12 100.33,53.34 100.33,74.295 97.155,77.47 97.155,91.44
MUTE_CTRL: R67.2 U7.16 | length 70.4
  Bottom Layer w0.381: R67.2 104.775,83.82 111.76,76.835 128.905,76.835 131.445,74.295 131.445,65.405 122.555,56.515 122.555,52.705 123.19,52.07 125.73,52.07 129.54,48.26 U7.16
NetC3_2: C3.2 U2.16 | length 5.1
  Bottom Layer w0.381: C3.2 U2.16
NetC4_2: C4.2 U2.17 | length 5.1
  Bottom Layer w0.381: U2.17 C4.2
NetC5_2: C5.2 U2.15 | length 5.1
  Bottom Layer w0.381: C5.2 U2.15
NetC6_2: C6.2 U2.18 | length 5.1
  Bottom Layer w0.381: U2.18 C6.2
NetC7_2: C7.2 U2.13 | length 5.1
  Bottom Layer w0.381: C7.2 U2.13
NetC8_2: C8.2 U2.20 | length 5.1
  Bottom Layer w0.381: U2.20 C8.2
NetC9_1: C9.1 U2.21 | length 25.9
  Top Layer w0.381: v1(97.79,34.29) v1(97.79,48.26)
  Bottom Layer w0.381: C9.1 96.52,33.02 v1(97.79,34.29) ; v1(97.79,48.26) U2.21
NetC10_2: C10.2 U2.11 | length 6.1
  Bottom Layer w0.381: C10.2 92.075,48.26 93.98,50.165 94.615,50.165 U2.11
NetC11_2: C11.2 U2.22 | length 6.5
  Bottom Layer w0.381: U2.22 105.41,50.165 107.315,48.26 C11.2
NetC12_1: C12.1 U2.19 | length 13.9
  Top Layer w0.381: v1(103.505,33.02) v1(103.505,43.18)
  Bottom Layer w0.381: C12.1 v1(103.505,33.02) ; v1(103.505,43.18) U2.19
NetC13_1: C13.1 C21.1 U2.23 | length 18.4
  Bottom Layer w0.381: U2.23 102.87,55.88 102.87,58.42 104.14,59.69 106.68,59.69 107.95,60.96 C21.1 C13.1
NetC13_2: C13.2 U2.25 | length 5.1
  Bottom Layer w0.381: U2.25 C13.2
NetC14_1: C14.1 U2.26 | length 8.7
  Bottom Layer w0.381: U2.26 106.68,62.23 111.76,62.23 C14.1
NetC14_2: C14.2 U2.27 | length 5.1
  Bottom Layer w0.381: U2.27 C14.2
NetC15_1: C15.1 C22.1 U2.10 | length 17.5
  Bottom Layer w0.381: C15.1 C22.1 92.075,60.96 93.345,59.69 95.885,59.69 97.155,58.42 97.155,55.245 U2.10
NetC15_2: C15.2 U2.8 | length 5.1
  Bottom Layer w0.381: C15.2 U2.8
NetC16_1: C16.1 U2.7 | length 8.7
  Bottom Layer w0.381: C16.1 88.9,62.23 93.98,62.23 U2.7
NetC16_2: C16.2 U2.6 | length 5.1
  Bottom Layer w0.381: C16.2 U2.6
NetC17_1: C17.1 U2.24 | length 5.1
  Bottom Layer w0.381: U2.24 C17.1
NetC17_2: C17.2 R13.1 R16.1 | length 8.7
  Bottom Layer w0.381: R16.1 R13.1 110.49,53.34 C17.2
NetC18_1: C18.1 U2.28 | length 5.1
  Bottom Layer w0.381: U2.28 C18.1
NetC19_1: C19.1 U2.9 | length 5.1
  Bottom Layer w0.381: C19.1 U2.9
NetC19_2: C19.2 R14.1 R17.1 | length 8.7
  Bottom Layer w0.381: C19.2 90.17,53.34 R17.1 R14.1
NetC20_1: C20.1 U2.5 | length 5.1
  Bottom Layer w0.381: C20.1 U2.5
NetC21_2: C21.2 R16.2 | length 13
  Bottom Layer w0.381: C21.2 114.3,60.96 115.57,59.69 115.57,53.34 R16.2
NetC22_2: C22.2 R17.2 | length 11.2
  Bottom Layer w0.381: R17.2 82.55,58.42 85.09,60.96 C22.2
NetD1_1: D1.1 R39.2 | length 7.6
  Bottom Layer w0.381: R39.2 D1.1@172.72,116.84
NetD2_1: D2.1 R40.2 | length 2.5
  Bottom Layer w0.381: R40.2 D2.1@167.64,114.3
NetD3_1: D3.1 R41.2 | length 7.6
  Bottom Layer w0.381: R41.2 D3.1@172.72,111.76
NetD4_1: D4.1 R42.2 | length 2.5
  Bottom Layer w0.381: R42.2 D4.1@167.64,109.22
NetD5_1: D5.1 R43.2 | length 7.6
  Bottom Layer w0.381: R43.2 D5.1@172.72,106.68
NetD6_1: D6.1 R44.2 | length 2.5
  Bottom Layer w0.381: R44.2 D6.1@167.64,104.14
NetD7_1: D7.1 R45.2 | length 7.6
  Bottom Layer w0.381: R45.2 D7.1@172.72,101.6
NetD8_1: D8.1 R46.2 | length 2.5
  Bottom Layer w0.381: R46.2 D8.1@167.64,99.06
NetD9_1: D9.1 R47.2 | length 7.6
  Bottom Layer w0.381: R47.2 D9.1@172.72,93.98
NetD10_1: D10.1 R48.2 | length 2.5
  Bottom Layer w0.381: R48.2 D10.1@167.64,91.44
NetD11_1: D11.1 R49.2 | length 7.6
  Bottom Layer w0.381: R49.2 D11.1@172.72,88.9
NetD12_1: D12.1 R50.2 | length 2.5
  Bottom Layer w0.381: R50.2 D12.1@167.64,86.36
NetD13_1: D13.1 R54.2 | length 7.6
  Bottom Layer w0.381: R54.2 D13.1@172.72,83.82
NetD14_1: D14.1 R55.2 | length 2.5
  Bottom Layer w0.381: R55.2 D14.1@167.64,81.28
NetD15_1: D15.1 R57.2 | length 7.6
  Bottom Layer w0.381: R57.2 D15.1@172.72,78.74
NetD16_1: D16.1 R58.2 | length 2.5
  Bottom Layer w0.381: R58.2 D16.1@167.64,76.2
NetD17_1: D17.1 R59.2 | length 7.6
  Bottom Layer w0.381: R59.2 D17.1@172.72,71.12
NetD18_1: D18.1 R60.2 | length 2.5
  Bottom Layer w0.381: R60.2 D18.1@167.64,68.58
NetD19_1: D19.1 R61.2 | length 7.6
  Bottom Layer w0.381: R61.2 D19.1@172.72,66.04
NetD20_1: D20.1 R62.2 | length 2.5
  Bottom Layer w0.381: R62.2 D20.1@167.64,63.5
NetD21_1: D21.1 R63.2 | length 7.6
  Bottom Layer w0.381: R63.2 D21.1@172.72,60.96
NetD22_1: D22.1 R64.2 | length 2.5
  Bottom Layer w0.381: R64.2 D22.1@167.64,58.42
NetD23_1: D23.1 R65.2 | length 7.6
  Bottom Layer w0.381: R65.2 D23.1@172.72,55.88
NetD24_1: D24.1 R66.2 | length 2.5
  Bottom Layer w0.381: R66.2 D24.1@167.64,53.34
NetQ1_2: Q1.2 R67.1 | length 3.8
  Bottom Layer w0.381: R67.1 Q1.2
NetR1_1: R1.1 R2.2 U1.2 | length 15
  Bottom Layer w0.381: R1.1 45.72,71.12 48.26,68.58 U1.2
NetR3_2: R3.2 R4.2 U1.3 | length 6.3
  Bottom Layer w0.381: R4.2 R3.2 U1.3
NetR5_1: R5.1 R6.2 U1.6 | length 16.1
  Bottom Layer w0.381: R5.1 50.8,53.34 55.88,58.42 U1.6
NetR7_2: R7.2 R8.2 U1.5 | length 6.3
  Bottom Layer w0.381: R7.2 R8.2 U1.5
NetR9_1: R9.1 R10.2 U1.9 | length 16.1
  Bottom Layer w0.381: U1.9 66.04,58.42 R10.2 73.66,55.88 76.2,53.34 R9.1
NetR11_2: R11.2 R12.2 U1.10 | length 6.3
  Bottom Layer w0.381: U1.10 R12.2 R11.2
NetR15_1: R15.1 R18.2 U1.13 | length 15
  Bottom Layer w0.381: U1.13 73.66,68.58 76.2,71.12 R15.1
NetR19_2: R19.2 R20.2 U1.12 | length 6.3
  Bottom Layer w0.381: U1.12 R19.2 R20.2
NetR21_1: R21.1 R22.2 U3.2 | length 15
  Bottom Layer w0.381: R21.1 50.8,48.26 R22.2 U3.2
NetR23_2: R23.2 R24.2 U3.3 | length 6.3
  Bottom Layer w0.381: R24.2 R23.2 U3.3
NetR25_1: R25.1 R26.2 U3.6 | length 16.1
  Bottom Layer w0.381: R25.1 48.26,30.48 50.8,33.02 R26.2 55.88,35.56 U3.6 ; R26.2@53.359,33.039 R26.2@53.379,33.02
NetR27_2: R27.2 R28.2 U3.5 | length 6.3
  Bottom Layer w0.381: R28.2 R27.2 U3.5
NetR29_1: R29.1 R30.2 U3.9 | length 16.1
  Bottom Layer w0.381: U3.9 66.04,35.56 R30.2 76.2,33.02 R29.1
NetR31_2: R31.2 R32.2 U3.10 | length 6.3
  Bottom Layer w0.381: U3.10 R32.2 R31.2
NetR33_1: R33.1 R34.2 U3.13 | length 15
  Bottom Layer w0.381: U3.13 76.2,45.72 R33.1
NetR35_2: R35.2 R36.2 U3.12 | length 6.3
  Bottom Layer w0.381: U3.12 R35.2 R36.2
NetR37_1: R37.1 R38.2 U6.1 | length 8.7
  Bottom Layer w0.381: R38.2 R37.1 121.92,114.3 U6.1
NetU8_9: U8.9 U9.14 | length 25
  Bottom Layer w0.381: U9.14 151.13,88.9 152.4,90.17 156.21,90.17 157.48,91.44 157.48,99.06 156.21,100.33 152.4,100.33 151.13,99.06 U8.9
NetU9_9: U9.9 U10.14 | length 25
  Bottom Layer w0.381: U10.14 151.13,66.04 152.4,67.31 156.21,67.31 157.48,68.58 157.48,76.2 156.21,77.47 152.4,77.47 151.13,76.2 U9.9
OUTLF: C26.1 U2.4 | length 5.1
  Bottom Layer w0.381: C26.1 U2.4
OUTLR: C27.1 U2.3 | length 5.1
  Bottom Layer w0.381: C27.1 U2.3
OUTRF: C30.1 U2.29 | length 5.1
  Bottom Layer w0.381: U2.29 C30.1
OUTRR: C31.1 U2.30 | length 5.1
  Bottom Layer w0.381: U2.30 C31.1
R1_IN: C27.2 U4.13 | length 22
  Bottom Layer w0.381: C27.2 96.52,80.01 96.52,87.63 U4.13
R2_IN: C31.2 U5.13 | length 117.3
  Bottom Layer w0.381: U5.13 66.294,90.424 66.294,90.482 72.078,96.266 77.793,96.266 82.238,100.711 92.701,100.711 96.892,96.52 97.79,96.52 114.3,96.52 118.745,92.075 118.745,83.185 115.57,80.01 112.132,80.01 105.147,86.995 100.965,86.995 99.06,85.09 99.06,82.55 100.965,80.645 102.235,80.645 104.775,78.105 106.045,78.105 C31.2
RB6: JP1.5 U7.12 | length 12.7
  Bottom Layer w0.381: U7.12 JP1.5
RB7: JP1.4 U7.13 | length 12.7
  Bottom Layer w0.381: U7.13 JP1.4
RIGHT_1+: J1.A19 J1.C19 U4.7 | length 77.6
  Bottom Layer w0.635: J1.A19 37.63,81.75 38.735,80.645 66.04,80.645 68.58,83.185 68.58,89.535 73.025,93.98 78.74,93.98 83.185,98.425 86.995,98.425 87.63,97.79 U4.7
RIGHT_1-: J1.A20 J1.C20 U4.9 | length 80.5
  Bottom Layer w0.635: J1.A20 39.535,84.29 42.291,81.534 65.672,81.534 67.691,83.553 67.691,89.903 72.657,94.869 78.372,94.869 82.817,99.314 87.363,99.314 87.617,99.06 87.63,99.06 90.17,96.52 U4.9
RIGHT_2+: J1.A23 J1.C23 U5.7 | length 36.1
  Bottom Layer w0.635: J1.A23 40.475,91.91 45.72,97.155 55.88,97.155 57.15,95.885 U5.7
RIGHT_2-: J1.A24 J1.C24 U5.9 | length 38.3
  Bottom Layer w0.635: J1.A24 41.11,94.45 45.085,98.425 56.515,98.425 59.69,95.25 U5.9
S_CLOCK: U7.17 U8.12 U9.12 U10.12 | length 107.3
  Bottom Layer w0.381: U7.17 130.175,50.8 128.905,52.07 128.905,57.785 130.81,59.69 135.89,59.69 140.97,64.77 144.78,64.77 148.59,60.96 151.13,60.96 152.4,62.23 157.48,62.23 158.75,63.5 158.75,106.68 157.48,107.95 152.4,107.95 151.13,106.68 U8.12 ; U9.12 151.13,83.82 152.4,85.09 158.75,85.09
S_DATA: U7.18 U8.14 | length 101.5
  Top Layer w0.381: v1(137.16,50.8) v1(142.24,50.8)
  Bottom Layer w0.381: U7.18 133.35,53.34 135.89,50.8 v1(137.16,50.8) ; v1(142.24,50.8) 157.48,50.8 161.29,54.61 161.29,111.76 160.02,113.03 152.4,113.03 151.13,111.76 U8.14
S_LATCH: U7.1 U8.11 U9.11 U10.11 | length 121.4
  Top Layer w0.381: v1(156.21,82.55) v1(160.02,82.55) ; v1(156.21,105.41) v1(160.02,105.41)
  Bottom Layer w0.381: U7.1 126.365,53.34 130.175,49.53 133.35,49.53 133.985,50.165 133.985,51.435 133.35,52.07 130.81,52.07 130.175,52.705 130.175,56.515 132.08,58.42 137.16,58.42 140.97,62.23 144.78,62.23 148.59,58.42 151.13,58.42 152.4,59.69 158.75,59.69 160.02,60.96 v1(160.02,105.41) ; U9.11 151.13,81.28 152.4,82.55 v1(156.21,82.55) ; U8.11 151.13,104.14 152.4,105.41 v1(156.21,105.41)
SCL: J1.A2 J1.C2 U7.10 | length 116.3
  Bottom Layer w0.381: J1.A2 J1.C2 35.78,38.515 37.465,36.83 37.465,27.94 38.1,27.305 130.81,27.305 132.08,28.575 U7.10
SCL': U2.32 U7.9 | length 95.1
  Top Layer w0.381: v1(102.235,35.56) v1(102.235,72.39)
  Bottom Layer w0.381: v1(102.235,35.56) 114.3,35.56 115.57,36.83 115.57,42.545 117.475,44.45 125.73,44.45 128.27,41.91 128.27,39.37 125.73,36.83 123.19,36.83 121.92,35.56 121.92,34.29 123.19,33.02 U7.9 ; v1(102.235,72.39) 106.68,72.39 107.315,73.025 107.315,74.295 U2.32
SDA: J1.A3 J1.C3 U7.6 | length 114.2
  Bottom Layer w0.381: J1.A3 35.09,41.11 J1.C3@35.56,40.64 ; J1.C3 35.78,41.055 38.1,38.735 38.1,28.575 38.735,27.94 118.11,27.94 120.857,30.687 120.857,37.037 U7.6
SDA': U2.1 U7.7 | length 79.4
  Top Layer w0.381: v1(99.06,35.56) v1(99.06,72.39)
  Bottom Layer w0.381: U2.1 96.52,76.2 99.06,73.66 v1(99.06,72.39) ; v1(99.06,35.56) 100.33,34.29 115.57,34.29 123.19,41.91 125.73,41.91 127,40.64 127,39.37 125.73,38.1 U7.7
TRB_0: R59.1 U10.15 | length 6.1
  Bottom Layer w0.381: U10.15 152.4,71.12 R59.1
TRB_1: R60.1 U10.1 | length 14.8
  Bottom Layer w0.381: U10.1 144.78,71.12 148.59,67.31 151.13,67.31 152.4,68.58 R60.1
TRB_2: R61.1 U10.2 | length 14.8
  Bottom Layer w0.381: U10.2 144.78,68.58 148.59,64.77 151.13,64.77 152.4,66.04 R61.1
TRB_3: R62.1 U10.3 | length 14.8
  Bottom Layer w0.381: U10.3 144.78,66.04 148.59,62.23 151.13,62.23 152.4,63.5 R62.1
TRB_4: R63.1 U10.4 | length 14.8
  Bottom Layer w0.381: U10.4 144.78,63.5 148.59,59.69 151.13,59.69 152.4,60.96 R63.1
TRB_5: R64.1 U10.5 | length 14.8
  Bottom Layer w0.381: U10.5 144.78,60.96 148.59,57.15 151.13,57.15 152.4,58.42 R64.1
TRB_6: R65.1 U10.6 | length 14.8
  Bottom Layer w0.381: U10.6 144.78,58.42 148.59,54.61 151.13,54.61 152.4,55.88 R65.1
TRB_7: R66.1 U10.7 | length 14.8
  Bottom Layer w0.381: U10.7 144.78,55.88 148.59,52.07 151.13,52.07 152.4,53.34 R66.1
TTL_RX: P1.2 U7.8 | length 31.5
  Bottom Layer w0.381: U7.8 128.27,35.56 129.54,36.83 148.59,36.83 149.86,38.1 P1.2
TTL_TX: P1.3 U7.11 | length 25
  Bottom Layer w0.381: U7.11 139.7,35.56 142.24,33.02 147.32,33.02 149.86,35.56 P1.3
VOL_0: R39.1 U8.15 | length 6.1
  Bottom Layer w0.381: U8.15 152.4,116.84 R39.1
VOL_1: R40.1 U8.1 | length 14.8
  Bottom Layer w0.381: U8.1 144.78,116.84 148.59,113.03 151.13,113.03 152.4,114.3 R40.1
VOL_2: R41.1 U8.2 | length 14.8
  Bottom Layer w0.381: U8.2 144.78,114.3 148.59,110.49 151.13,110.49 152.4,111.76 R41.1
VOL_3: R42.1 U8.3 | length 14.8
  Bottom Layer w0.381: U8.3 144.78,111.76 148.59,107.95 151.13,107.95 152.4,109.22 R42.1
VOL_4: R43.1 U8.4 | length 14.8
  Bottom Layer w0.381: U8.4 144.78,109.22 148.59,105.41 151.13,105.41 152.4,106.68 R43.1
VOL_5: R44.1 U8.5 | length 14.8
  Bottom Layer w0.381: U8.5 144.78,106.68 148.59,102.87 151.13,102.87 152.4,104.14 R44.1
VOL_6: R45.1 U8.6 | length 14.8
  Bottom Layer w0.381: U8.6 144.78,104.14 148.59,100.33 151.13,100.33 152.4,101.6 R45.1
VOL_7: R46.1 U8.7 | length 14.8
  Bottom Layer w0.381: U8.7 145.043,101.6 148.853,97.79 151.13,97.79 152.4,99.06 R46.1
pads on no net: JP1.6 S1.4 S1.5 U2.14 U4.12 U5.12 U10.9

## Polygon pours and split planes (outlines as drawn)
GND on Bottom Layer "Bottom Layer-GND" (solid, remove dead copper, pour order 1000): 25.4,25.4 185.42,25.4 185.42,125.73 25.4,125.73

## Keep-outs
Keep-Out Layer:
  lines w0.381: 27.94,70.79 27.94,122.86 182.88,122.86 182.88,28.88 ; 27.94,80.01 27.94,26.67 182.88,26.67 182.88,121.92

## Silkscreen, mask and mechanical layers (free items; w line width, h text height)
Mechanical 1:
  lines w0.381: 25.4,125.4 25.4,25.4 185.4,25.4 ; 25.42,125.4 185.42,125.4 185.42,25.4
Mechanical 2:
  lines w0.381: 11.67,75.4 190.67,75.4

## Text inside footprints (layer, text, board x,y; h text height)
C9: Top Overlay "+" at 91.97,32.27 h1.5
C12: Top Overlay "+" at 99.59,32.27 h1.5
C24: Top Overlay "+" at 117.525,77.99 h1.5
C29: Top Overlay "+" at 117.525,95.77 h1.5
C32: Top Overlay "+" at 130.07,111.01 h1.5
C34: Top Overlay "+" at 69.11,113.55 h1.5
C35: Top Overlay "+" at 102.13,113.55 h1.5
C36: Top Overlay "+" at 102.13,102.12 h1.5
J1: Top Overlay "21" at 38.48,85.58 h1.5 r90; Top Overlay "11" at 38.48,60.555 h1.5 r90; Top Overlay "32" at 38.48,113.52 h1.5 r90; Top Overlay "c" at 36.28,33.82 h1.5 r90; Top Overlay "a" at 31.2,33.82 h1.5 r90; Top Overlay "1" at 38.48,35.78 h1.5 r90; Mechanical 1 "PCB Edge" at 24.9,28.93 h0.6 r90
Q1: Top Overlay "1" at 118.23,81.92 h1.5; Top Overlay "3" at 118,84.33 h1.5
U6: Top Overlay "1" at 121.67,113.165 h1.5; Top Overlay "2" at 126.5,113.165 h1.5; Top Overlay "3" at 123.96,113.165 h1.5